# EAGLE board clapclap2313 (EAGLE 6.0)
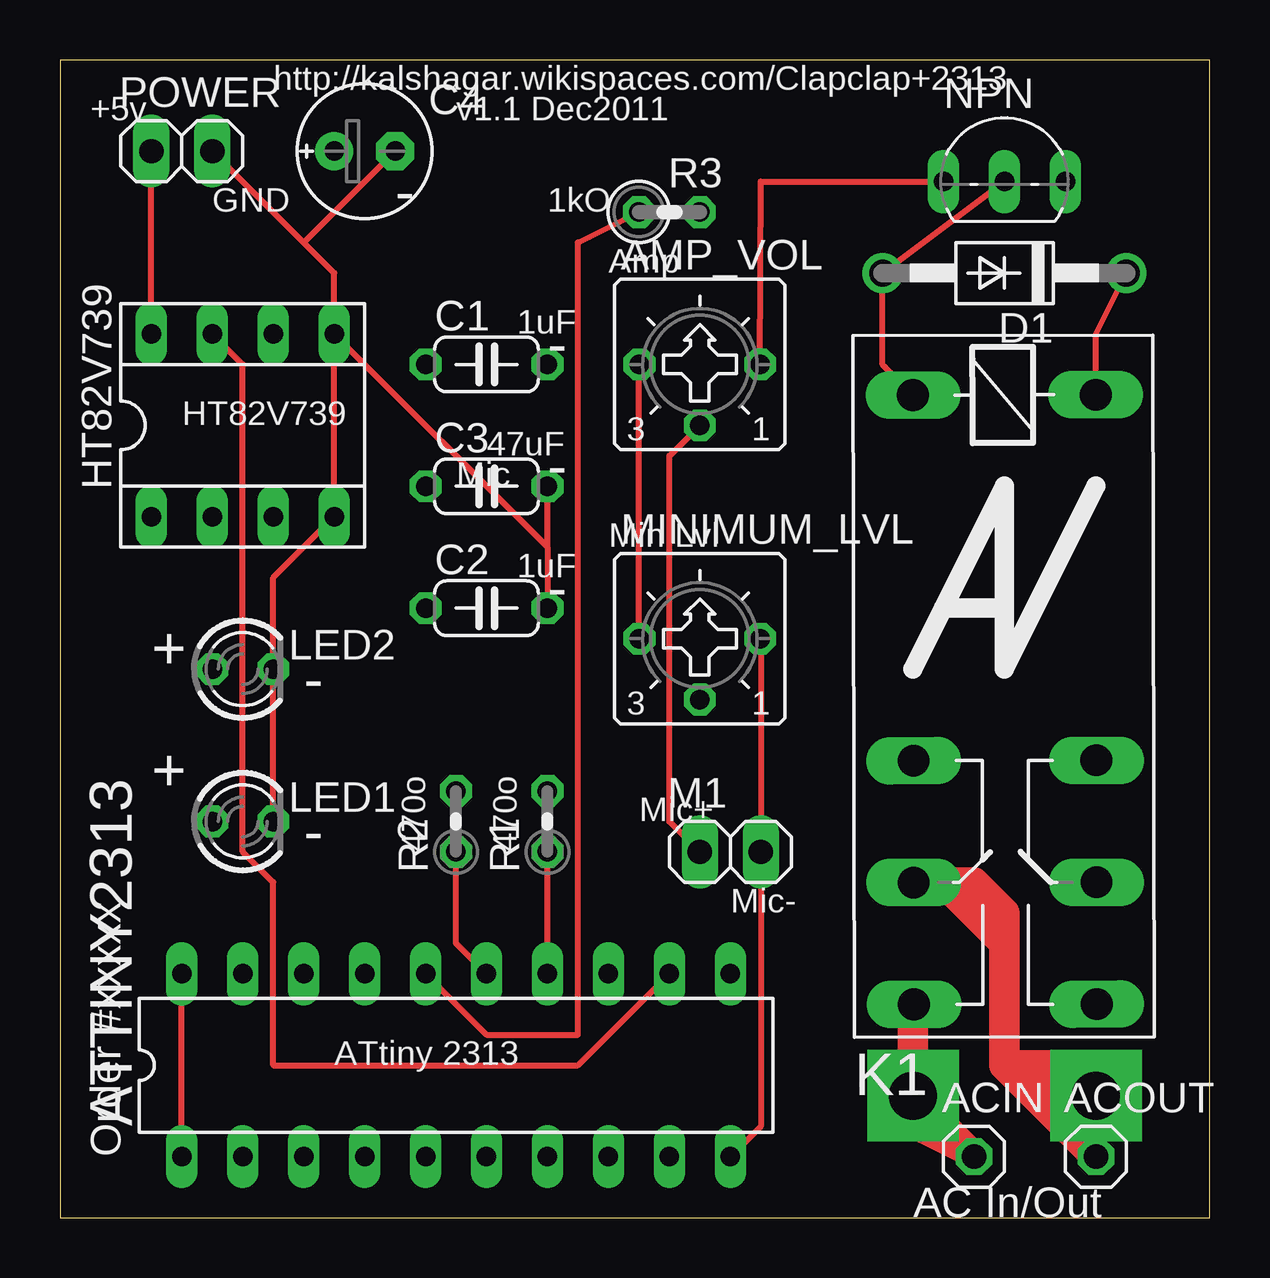
[diagram p0: board, top side]
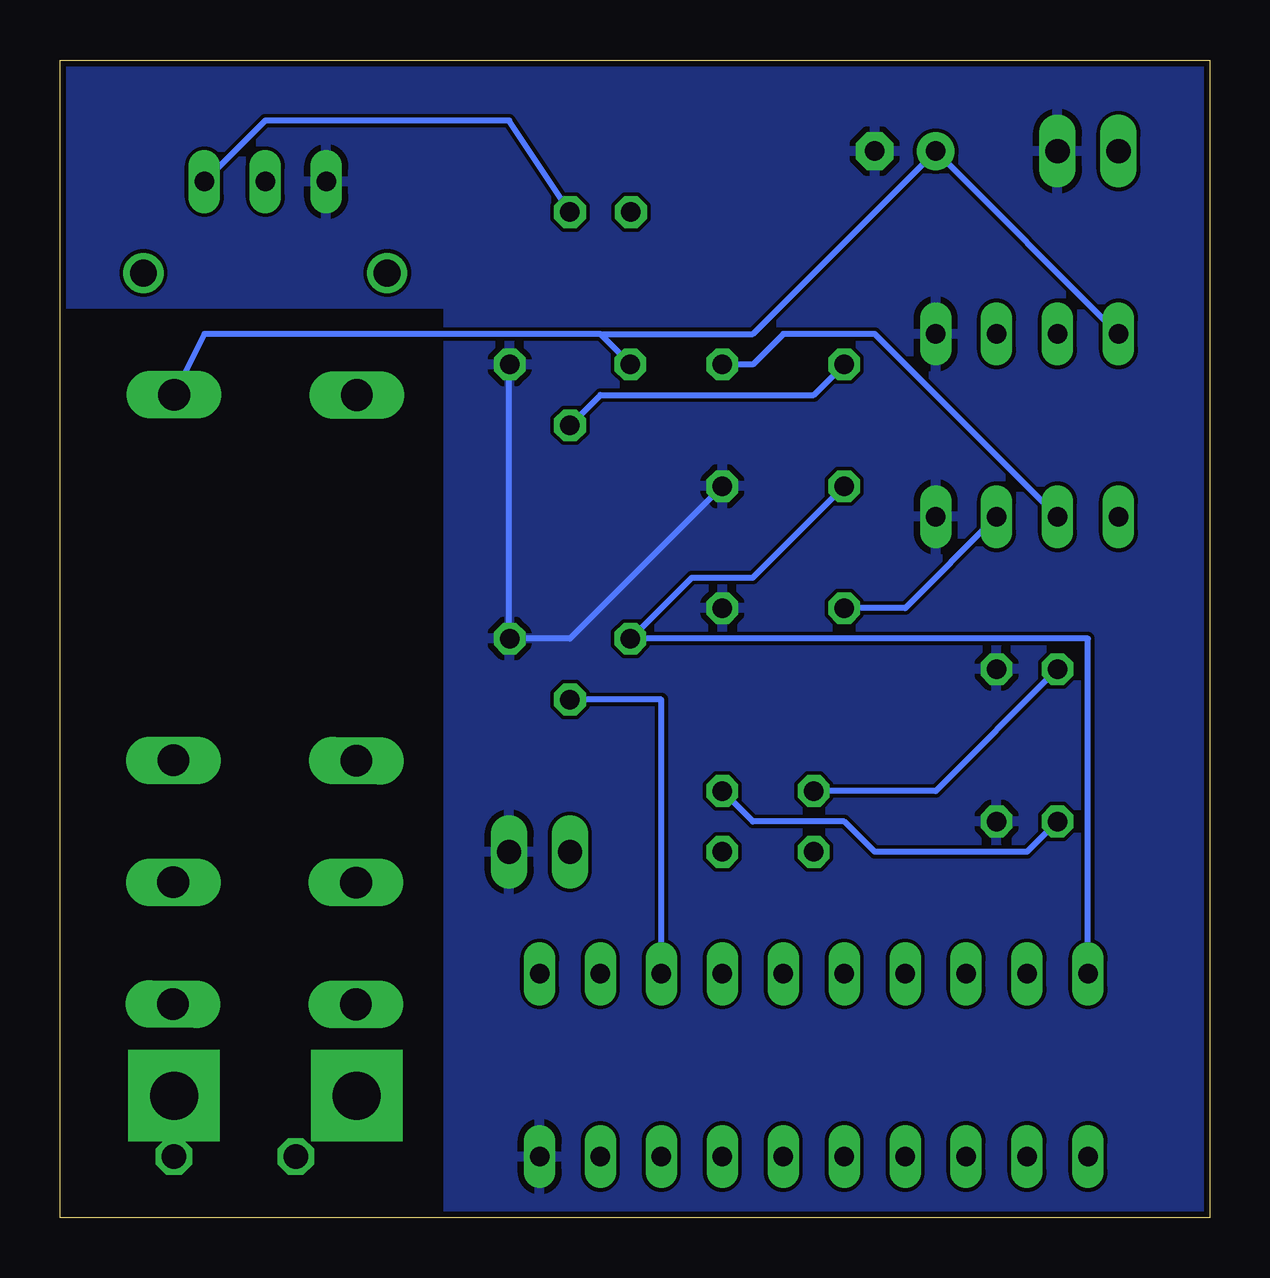
[diagram p1: board, bottom side, seen from below]

Size 47.93 x 48.25 mm. Coordinates in mm from the lower left corner, seen from the top.
Outline: 0,0 47.93,0 47.93,48.25 0,48.25 0,0
Copper layers (1*16): Top 0.035mm / dielectric 1.5mm / Bottom 0.035mm
Design rules: minimum track width 6mil, minimum drill 12mil, track to track 6mil, track to pad 6mil, pad to pad 6mil, via to via 6mil, smd to smd 0mil, copper to edge 10mil, drill to drill 10mil, minimum pad ring 10mil, minimum via ring 6mil, stop-mask expansion 2mil, vias tented up to drill 100mil, thermal gap 10mil

## Footprints (pad centres in the part's own frame; a part is rotated, then mirrored left to right if it is on the bottom)
1X01 = drill 1.016 octagon: 1 0,0
CT6 = drill 0.813 octagon: A 2.515,0; E -2.515,0; S 0,-2.54
DIL20 = drill 0.813 long: 1 -11.43,-3.81; 2 -8.89,-3.81; 3 -6.35,-3.81; 4 -3.81,-3.81; 5 -1.27,-3.81; 6 1.27,-3.81; 7 3.81,-3.81; 8 6.35,-3.81; 9 8.89,-3.81; 10 11.43,-3.81; 11 11.43,3.81; 12 8.89,3.81; 13 6.35,3.81; 14 3.81,3.81; 15 1.27,3.81; 16 -1.27,3.81; 17 -3.81,3.81; 18 -6.35,3.81; 19 -8.89,3.81; 20 -11.43,3.81
C050-024X044 = drill 0.813 octagon: 1 -2.54,0; 2 2.54,0
E2,5-6E = drill 0.813 pad 1.575: + -1.27,0 | drill 0.813 pad 1.575 octagon: - 1.27,0
DO41-10 = drill 1.118: A 5.08,0; C -5.08,0
SOCKET-08 = drill 0.813 long: 1 -3.81,-3.81; 2 -1.27,-3.81; 3 1.27,-3.81; 4 3.81,-3.81; 5 3.81,3.81; 6 1.27,3.81; 7 -1.27,3.81; 8 -3.81,3.81
F4052 = drill 1.321 long: 1 -3.81,3.81; 2 -3.81,-3.81; O1 11.43,-3.81; O2 11.43,3.81; P1 16.51,-3.81; P2 16.51,3.81; S1 21.59,-3.81; S2 21.59,3.81
LED3MM = drill 0.813 octagon: A -1.27,0; K 1.27,0
1X02 = drill 1.016 long: 1 -1.27,0; 2 1.27,0
TO92-ECB = drill 0.813 long: B 2.54,0; C 0,0; E -2.54,0
0204V = drill 0.813 octagon: 1 -1.27,0; 2 1.27,0
0207/2V = drill 0.813 octagon: 1 -1.27,0; 2 1.27,0

## Placement (x,y rotation side)
ACIN  [1X01]  38.1,2.54 0 top
ACOUT  [1X01]  43.18,2.54 0 top
AMP_VOL  5k  [CT6]  26.67,35.56 0 top
ATTINY2313  AT90S2313P  [DIL20]  16.51,6.35 0 top
C1  1uF  [C050-024X044]  17.78,35.56 0 top
C2  1uF  [C050-024X044]  17.78,25.4 0 top
C3  47uF  [C050-024X044]  17.78,30.48 0 top
C4  220uF  [E2,5-6E]  12.7,44.45 0 top
D1  1N4004  [DO41-10]  39.37,39.37 180 top
HT82V739  [SOCKET-08]  7.62,33.02 0 top
K1  4052  [F4052]  39.37,30.48 270.1 top
LED1  red  [LED3MM]  7.62,16.51 0 top
LED2  green  [LED3MM]  7.62,22.86 0 top
M1  Mic  [1X02]  27.94,15.24 0 top
MINIMUM_LVL  5k  [CT6]  26.67,24.13 0 top
NPN  2SC2120  [TO92-ECB]  39.37,43.18 0 top
POWER  5v  [1X02]  5.08,44.45 0 top
R1  470  [0204V]  20.32,16.51 90 top
R2  470  [0204V]  16.51,16.51 90 top
R3  1k  [0207/2V]  25.4,41.91 0 top

## Library data of the parts
ACIN ACOUT M1 POWER = pinhead
AMP_VOL MINIMUM_LVL = pot
ATTINY2313 = atmel; OC_FARNELL: unknown; OC_NEWARK: unknown
C1-C3 R1-R3 = resistor
C4 = rcl
D1 = diode
HT82V739 = ic-package
K1 = relay; OC_FARNELL: unknown; OC_NEWARK: unknown
LED1 LED2 = led
NPN = transistor

## Nets
ACIN: ACIN.1 K1.S1
ACOUT: ACOUT.1 K1.P1
GND: AMP_VOL.A ATTINY2313.10 C2.2 C3.2 C4.- HT82V739.4 HT82V739.5 LED1.K LED2.K M1.2 MINIMUM_LVL.A NPN.E POWER.2
N$1: C2.1 HT82V739.3
N$2: ATTINY2313.16 R3.1
N$3: AMP_VOL.S C1.1 M1.1
N$4: ATTINY2313.14 R1.1
N$5: C1.2 HT82V739.2
N$6: ATTINY2313.15 R2.1
N$7: LED1.A R1.2
N$8: NPN.B R3.2
N$9: D1.A K1.2 NPN.C
N$10: ATTINY2313.12 HT82V739.7
N$11: LED2.A R2.2
N$12: ATTINY2313.13 MINIMUM_LVL.S
VCC: AMP_VOL.E ATTINY2313.1 ATTINY2313.20 C3.1 C4.+ D1.C HT82V739.8 K1.1 MINIMUM_LVL.E POWER.1

## Tracks (layer width: path | path; a pad name or v marks a point on that pad's centre or on a via)
ACIN  (via drill 2 pad 3.81)
  Top 1.016: ACIN.1 35.56,3.81 | v35.56,5.08 35.56,6.35 K1.S1
  Top 1.27: 35.56,8.89 v35.56,5.08 | v35.56,5.08 35.56,3.81 36.83,3.81 ACIN.1 v35.56,5.08
ACOUT
  Top 1.016: ACOUT.1 40.64,5.08 39.37,6.35 | 39.37,12.7 36.83,13.97 K1.P1
  Top 1.27: 39.37,6.35 41.91,6.35 40.64,5.08 | 39.37,6.35 ACOUT.1 | 39.37,6.35 39.37,11.43 | 39.37,12.7 38.1,12.7 | 38.1,12.7 36.83,13.97 | 38.1,12.7 39.37,11.43 | 39.37,11.43 39.37,12.7 | 39.37,12.7 38.1,13.97 35.56,13.97
GND
  Top 0.254: LED1.K LED2.K 8.89,26.67 HT82V739.4 HT82V739.5 | 10.16,40.64 11.43,39.37 HT82V739.5 | 10.16,40.64 POWER.2 | 10.16,40.64 C4.- | NPN.E 29.21,43.18 AMP_VOL.A | 20.32,27.94 C3.2 | 20.32,27.94 C2.2 | ATTINY2313.10 29.21,3.81 M1.2 29.21,24.13 MINIMUM_LVL.A | HT82V739.5 20.32,27.94
  Bottom 0.254: C3.2 26.67,24.13 MINIMUM_LVL.A 29.21,24.13 29.21,35.56 AMP_VOL.A
  pour Bottom: -3.81,50.8 53.34,50.8 53.34,49.53 53.34,38.1 31.75,38.1 31.75,36.83 31.75,-3.81 -5.08,-3.81 -5.08,-2.54 -3.81,-2.54
N$1
  Bottom 0.254: HT82V739.3 12.7,25.4 C2.1
N$2
  Top 0.254: ATTINY2313.16 17.78,7.62 21.59,7.62 21.59,40.64 R3.1
N$3
  Top 0.254: M1.1 25.4,16.51 25.4,31.75 AMP_VOL.S
  Bottom 0.254: AMP_VOL.S 25.4,34.29 16.51,34.29 C1.1
N$4
  Top 0.254: ATTINY2313.14 R1.1
N$5
  Bottom 0.254: HT82V739.2 13.97,36.83 17.78,36.83 19.05,35.56 C1.2
N$6
  Top 0.254: ATTINY2313.15 16.51,11.43 R2.1
N$7
  Bottom 0.254: LED1.A 7.62,15.24 13.97,15.24 15.24,16.51 19.05,16.51 R1.2
N$8
  Bottom 0.254: R3.2 29.21,45.72 39.37,45.72 NPN.B
N$9
  Top 0.254: NPN.C D1.A 34.29,35.56 K1.2
N$10
  Top 0.254: ATTINY2313.12 21.59,6.35 8.89,6.35 8.89,13.97 7.62,15.24 7.62,35.56 HT82V739.7
N$11
  Bottom 0.254: LED2.A 11.43,17.78 R2.2
N$12
  Bottom 0.254: ATTINY2313.13 22.86,21.59 MINIMUM_LVL.S
N$13  (via drill 2 pad 3.81)
  other vias: 43.18,5.08
VCC
  Top 0.254: HT82V739.8 POWER.1 | D1.C 43.18,36.83 K1.1 | ATTINY2313.1 ATTINY2313.20 | MINIMUM_LVL.E 24.13,24.13 24.13,35.56 AMP_VOL.E
  Bottom 0.254: HT82V739.8 C4.+ 19.05,36.83 25.4,36.83 | C3.1 19.05,26.67 21.59,26.67 24.13,24.13 | ATTINY2313.20 5.08,24.13 24.13,24.13 | 24.13,24.13 MINIMUM_LVL.E | 25.4,36.83 41.91,36.83 K1.1 | 25.4,36.83 24.13,35.56 AMP_VOL.E

## Text on the board
tPlace: http://kalshagar.wikispaces.com/Clapclap+2313 | +5v | v1.1 Dec2011 | GND | - | 1kO | Amp | 1uF | - | HT82V739 | 47uF | Mic | - | Min Lvl | 1uF | - | + | - | + | Mic+ | - | 470o | 470o | Mic- | ATtiny 2313 | Order #xxxxx | AC In/Out